# Altium PCB Cubit3_main_pcb.PcbDoc (part 4 of 4)
Units mm, origin at the board's own origin, x right, y up, seen from the top; angles counter-clockwise.
Board outline 58.47 x 70 mm, 4 copper layers (Top Layer, Layer 2, Layer 3, Bottom Layer), stack 0.602 mm thick; 134 components, 100 nets, 451 pads, 313 vias.
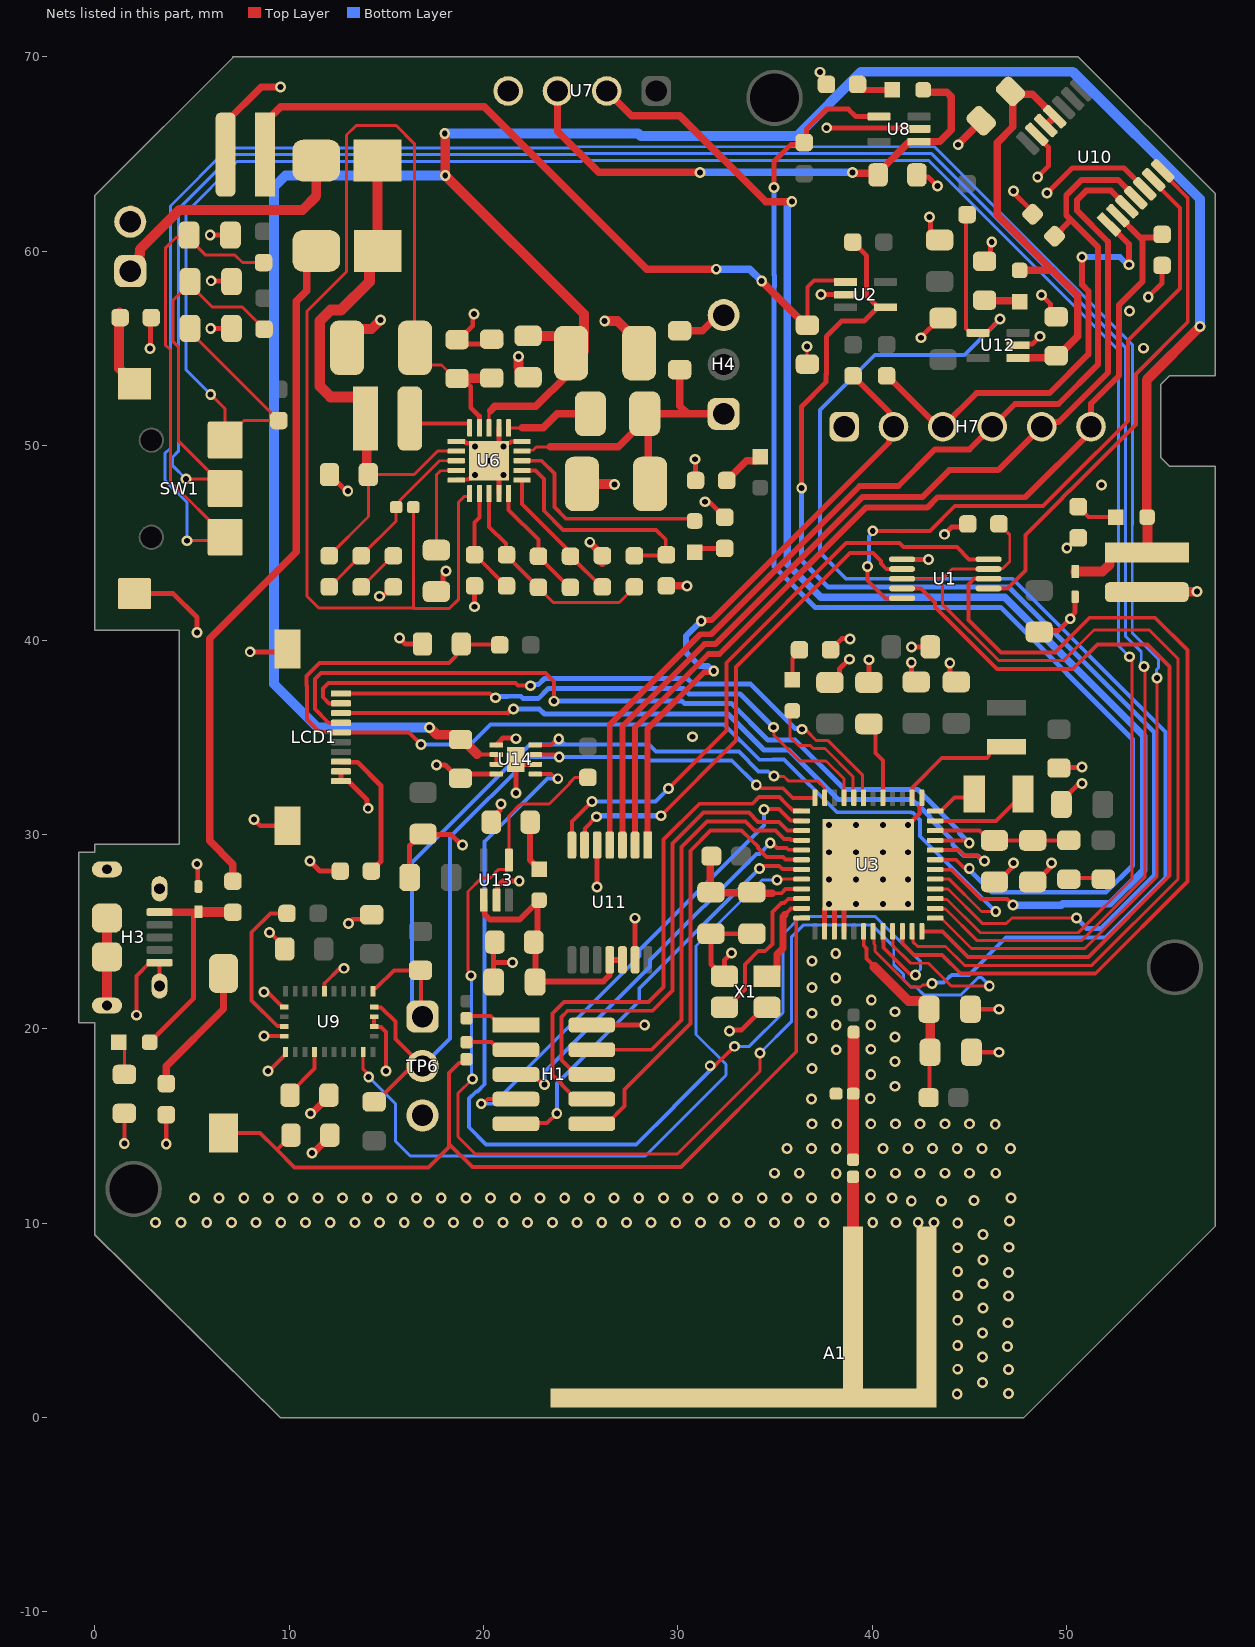
[diagram p4: the nets of this part, all layers, seen from the top]

## Via types
v1: diameter 0.559, hole 0.305, Top Layer to Bottom Layer, tented both sides, 311 vias
v2: diameter 0.61, hole 0.305, Top Layer to Bottom Layer, tented both sides, 2 vias

## Nets (pads, with @x,y where several pads share a name; then routed paths per layer and width w, separated by ;. In a path a pad name is that pad's centre, name@x,y a point inside that pad or via, vN(x,y) a via of type N, cw(c..) or ccw(c..) an arc to the next point about the centre after c; other vN are vias at no path point) (continued)
+3V7_VBAT: C24.1 C25.1 C42.1 H2.V+ LED7.A U4.1 U6.18 U14.2 U14.3 | length 138.9
  Top Layer w0.152: U6.18@20.294,50.916 20.294,51.726 20.364,51.797
  Top Layer w0.203: 19.66,34.145 19.697,34.108 U14.2@20.663,34.108 U14.3@20.663,33.608
  Top Layer w0.381: 20.364,51.797 20.587,52.02 22.697,52.02 24.331,53.655 24.356,53.655 25.174,54.473 C24.1@25.174,54.864
  Top Layer w0.508: v1(17.221,35.509) 17.235,35.509 17.615,35.13 18.575,35.13 C42.1@18.821,34.884 18.921,34.884 19.66,34.145 ; v1(18.009,66.065) 18.009,66.052 18.034,66.026 v1(18.034,63.906) 25.174,56.766 C24.1@25.174,54.864 ; C25.1@22.301,55.651 23.907,55.651 24.514,55.044 C24.1@24.514,54.762 ; U4.1@50.444,43.508 U4.1@50.444,43.525 51.856,43.525 52.222,43.891 52.222,44.247 52.476,44.501 H2.V+@54.127,44.501 54.166,44.539 LED7.A@54.166,46.38 ; LED7.A@54.127,46.38 54.127,53.391 v1(56.871,56.134)
  Bottom Layer w0.508: v1(17.221,35.509) 11.455,35.509 9.22,37.744 9.22,63.304 9.823,63.906 v1(18.034,63.906) ; v1(18.009,66.065) 27.963,66.065 28.093,65.936 36.129,65.936 39.433,69.24 50.317,69.24 56.871,62.687 v1(56.871,56.134)
+5V_VBUS: H3.1 LED8.A R23.1 U5.1 | length 11.5
  Top Layer w0.254: LED8.A@2.832,19.304 5.08,21.552 5.08,25.749 U5.1@5.334,26.003
  Top Layer w0.381: H3.1@3.335,26.003 U5.1@5.325,26.003
  Top Layer w0.508: U5.1@5.334,26.02 5.345,26.009 7.1,26.009 R23.1@7.112,25.997
AVDD: C18.1 C19.1 R17.2 U3.34 | length 7.1
  Top Layer w0.203: U3.34@43.237,30.198 45.53,30.198 46.036,29.693 C19.1@46.292,29.693 48.273,29.693 48.278,29.697 50.148,29.697 R17.2@50.153,29.702
BATT_MON_ALRT: U3.20 U14.5 | length 57.4
  Top Layer w0.203: U14.5@22.669,33.126 22.687,33.108 23.488,33.108 23.729,32.868 v1(23.825,32.868) ; v1(31.666,18.099) 31.782,17.984 31.783,17.984 32.259,18.459 32.276,18.459 v1(32.918,19.101) ; U3.20@40.552,25.013 40.566,24.999 40.566,24.502 40.572,24.496 40.572,24.172 41.912,22.832 42.164,22.832 v1(42.232,22.764)
  Bottom Layer w0.152: v1(32.918,19.101) 33.68,19.101 35.408,20.828 35.408,24.858 36.33,25.781 40.163,25.781 42.494,23.45 42.494,23.184 42.489,23.18 42.489,23.06 42.232,22.802 v1(42.232,22.764)
  Bottom Layer w0.203: v1(23.825,32.868) 23.301,32.868 20.066,29.633 20.066,17.161 19.689,16.785 19.63,16.785 19.253,16.408 19.253,14.935 20.142,14.046 27.863,14.046 29.793,15.976 29.793,16.005 31.723,17.935 31.723,18.043 v1(31.666,18.099)
BRD_Reset: C20.1 R13.1 SW2.1 U3.12 | length 46.8
  Top Layer w0.203: SW2.1@6.629,14.645 8.506,14.645 9.322,13.83 ; C20.1@10.1,14.529 10.1,14.509 9.42,13.83 9.322,13.83 ; R13.1@19.126,18.432 18.933,18.239 18.746,18.239 18.237,17.73 18.237,13.998 18.237,13.92 ; U3.12@36.367,25.698 36.122,25.698 36.094,25.67 36.094,18.822 30.154,12.882 19.431,12.882 18.315,13.998 18.237,13.92 ; 9.322,13.83 10.287,12.865 17.181,12.865 18.237,13.92
DECOUPLE: C16.1 U3.41 | length 4.1
  Top Layer w0.203: C16.1@39.913,35.679 40.159,35.433 40.159,34.198 40.552,33.805 U3.41@40.552,31.883
FEED: A1.FEED L2.2 | length 6.8
  Top Layer w0.254: A1.FEED@38.964,5.613 A1.FEED@39.014,5.664
  Top Layer w0.62: A1.FEED@39.014,5.664 L2.2@39.014,12.387
GND: A1.GND C1.2 C2.2 C3.2 C4.2 C5.2 C6.2 C7.2 C8.2 C9.2 C10.2 C11.2 C12.2 C13.2 C14.2 C15.2 C16.2 C17.2 C18.2 C19.2 C20.2 C21.2 C22.2 C23.2 C24.2 C25.2 C26.2 C27.2 C28.2 C29.2 C30.2 C31.2 C32.2 C33.2 C34.2 C35.2 C36.2 C37.2 C38.2 C39.2 C40.2 C41.2 C42.2 H1.2 H2.V- H3.5 H3.S1 H3.S2 H3.S3 H3.S4 H3.S5 H3.S6 H5.2 H7.1 H8.V- LCD1.9 LCD1.10 LCD1.11 LCD1.12 R1.1 R4.2 R6.1 R16.2 R18.1 R20.2 R26.1 R27.2 R31.2 R32.1 R34.1 R35.2 R36.1 R38.2 R40.2 R41.1 R42.2 R43.1 SW1.5 TP6.3 U1.6 U2.2 U3.0 U3.14 U3.15 U3.16 U3.37 U4.2 U5.2 U6.0 U6.1 U6.5 U6.9 U6.15 U6.17 U7.4 U8.2 U9.2 U9.5 U9.6 U9.17 U9.18 U9.25 U10.5 U10.13 U11.5 U11.13 U12.2 U13.2 U14.0 U14.1 U14.4 U14.6 X1.2 X1.4 | length 181.4
  Top Layer w0.152: v1(36.65,55.094) 36.65,54.211 C40.2@36.667,54.194
  Top Layer w0.203: v1(1.524,14.097) R35.2@1.524,15.653 ; v1(2.159,20.701) 2.159,22.725 2.86,23.426 3.335,23.426 H3.S2@3.335,22.226 ; v1(8.712,19.633) 8.725,19.621 U9.5@9.753,19.621 ; v1(8.712,21.894) 8.78,21.826 8.96,21.826 9.642,21.144 9.729,21.144 U9.2@9.753,21.121 ; v1(8.915,17.831) 8.975,17.831 9.815,18.671 U9.6@9.815,18.808 ; v1(9.001,24.955) 9.015,24.955 9.779,24.191 C30.2@9.779,24.105 ; U9.25@11.815,21.933 11.834,21.953 11.834,22.343 12.605,23.114 v1(12.827,23.114) ; U9.18@14.378,20.621 U9.17@14.378,20.121 14.397,20.101 14.737,20.101 14.994,19.845 v1(14.994,17.831) ; U6.5@18.604,48.226 18.632,48.254 19.195,48.254 19.243,48.303 19.37,48.303 v1(19.557,48.489) ; U6.0@21.158,50.09 21.217,50.149 21.37,50.149 21.425,50.205 21.962,50.205 U6.15@21.984,50.226 ; 42.426,31.072 42.426,31.448 U3.37@42.549,31.571
  Top Layer w0.254: SW1.5@2.046,42.388 4.043,42.388 5.263,41.168 v1(5.263,40.39) ; v1(2.845,54.991) 2.877,55.023 2.877,56.56 R4.2@2.908,56.591 ; v1(3.683,14.072) R18.1@3.683,15.583 ; v1(5.269,28.471) 5.301,28.439 5.301,27.353 U5.2@5.334,27.32 ; v1(5.943,60.833) C5.2@6.984,60.833 ; v1(5.969,56.032) C3.2@7.036,56.032 ; v1(5.994,58.483) C4.2@7.036,58.483 ; v1(8.001,39.395) 9.77,39.395 LCD1.11@9.921,39.546 ; v1(8.204,30.759) 8.518,30.446 LCD1.12@9.921,30.446 ; v1(11.074,28.626) 11.582,28.118 R1.1@12.637,28.118 ; C26.2@12.08,48.515 12.08,48.481 12.479,48.082 12.522,48.082 12.94,47.665 v1(13.022,47.665) ; LCD1.9@12.671,33.246 LCD1.10@12.671,32.746 13.036,32.746 14.013,31.769 14.013,31.404 v1(14.072,31.345) ; v1(13.056,25.425) 13.268,25.638 14.021,25.638 C29.2@14.249,25.867 ; v1(14.654,42.253) 14.713,42.311 14.89,42.311 15.342,42.763 R20.2@15.443,42.763 ; v1(15.673,40.106) 15.674,40.106 15.982,39.798 C2.2@16.863,39.798 ; C39.2@16.205,27.788 16.205,29.428 C1.2@16.8,30.023 ; C1.2@16.724,30.023 C1.2@16.8,30.023 ; v1@17.577,33.604 v1(17.577,33.579) 18.024,33.579 18.719,32.884 C42.2@18.821,32.884 19.046,33.108 U14.4@20.663,33.108 ; C27.2@17.577,42.494 17.924,42.842 17.924,43.409 v1(18.077,43.561) ; U6.1@18.604,50.226 18.607,50.223 19.017,50.223 19.116,50.124 19.396,50.124 v1(19.557,49.963) ; C23.2@18.644,55.458 18.744,55.458 19.449,56.163 19.449,56.711 v1(19.507,56.769) ; v1(18.923,29.454) 18.878,29.454 18.343,29.989 16.925,29.989 C1.2@16.891,30.023 C1.2@16.8,30.023 ; C23.2@19.16,55.227 C22.2@20.938,55.227 ; v1(19.541,41.714) R32.1@19.541,42.786 ; v1(20.294,49.226) 20.794,49.726 U6.17@20.794,50.916 ; R42.2@20.403,30.632 20.403,30.799 20.843,31.24 20.843,31.516 v1(20.902,31.575) ; C35.2@20.523,22.403 20.523,23.419 ; C37.2@20.523,24.46 20.523,23.419 ; U13.2@20.65,26.594 U13.2@20.676,26.619 20.73,26.673 20.73,27.343 20.997,27.61 v1(21.844,27.61) ; U14.1@20.663,34.608 20.843,34.788 20.843,34.796 21.006,34.959 21.632,34.959 v1(21.666,34.925) ; U6.9@20.794,47.536 20.794,48.328 20.955,48.489 v1(21.03,48.489) ; v1(21.03,49.963) U6.0@21.158,50.09 ; v1(21.488,23.419) 20.523,23.419 ; v1(21.666,32.131) U14.0@21.666,33.858 21.916,33.608 U14.6@22.669,33.608 ; U6.15@21.699,50.226 U6.15@21.984,50.226 ; C25.2@22.301,53.518 22.327,53.492 C25.2@22.339,53.505 ; H1.2@25.572,20.193 v1(28.296,20.193) ; v1(25.85,27.298) U11.5@25.85,29.45 ; v1@26.72,48.032 v1(26.745,48.007) ; U11.13@27.8,23.55 v1(27.8,25.692) ; v1(30.886,49.302) 30.911,49.277 R27.2@30.911,48.21 ; v1(31.394,47.117) 31.453,47.059 31.669,47.059 R26.1@32.41,46.318 ; X1.2@32.325,22.708 31.699,23.333 C8.2@31.699,24.892 C9.2@33.807,24.892 ; X1.2@32.395,22.708 32.395,23.53 v1(32.766,23.901) ; v1(32.664,19.888) 32.723,19.947 33.284,19.947 34.445,21.108 X1.4@34.595,21.108 ; v1(37.313,69.215) 37.313,69.133 37.384,69.061 37.384,68.848 R38.2@37.647,68.585 ; v1(37.363,57.785) 37.376,57.772 38.621,57.772 U2.2@38.633,57.76 ; U3.14@37.552,25.013 37.552,26.198 v1(37.77,26.416) ; v1(37.659,66.353) 42.355,66.353 U8.2@42.409,66.299 ; C17.2@37.821,37.821 37.912,37.821 38.307,38.216 38.307,38.511 38.811,39.014 v1(38.837,39.014) ; R16.2@37.859,39.497 38.435,40.073 38.844,40.073 v1(38.862,40.056) ; U3.15@38.052,25.013 38.052,26.698 U3.0@38.552,27.198 ; U3.16@38.552,25.013 U3.0@38.552,27.198 ; C16.2@39.827,37.821 v1(39.827,38.989) ; U1.6@41.536,44.155 42.891,44.155 v1(42.901,44.145) ; v1@41.935,39.649 v1(42.02,39.649) C15.2@42.986,39.649 ; v1(42.012,38.837) 42.012,38.1 C13.2@42.266,37.846 ; C32.2@42.3,63.932 42.407,63.826 42.876,63.826 43.336,63.366 v1(43.351,63.366) ; 42.426,31.072 v1(41.834,30.48) U3.0@39.802,28.448 U3.0@38.552,27.198 ; v1(42.505,55.552) 42.505,55.57 43.5,56.564 C38.2@43.648,56.564 ; U3.37@42.549,31.571 U3.37@42.549,31.88 ; v1(42.951,61.773) 43.01,61.714 43.01,60.977 43.405,60.581 C41.2@43.47,60.581 ; v1(43.713,45.441) 44.089,45.816 44.762,45.816 R6.1@44.92,45.974 ; v1(43.993,38.811) 44.005,38.799 44.005,38.188 43.993,38.176 C14.2@44.323,37.846 ; C11.2@45.06,21.006 v1(46.533,21.006) ; C10.2@45.11,18.796 v1(46.533,18.796) ; R40.2@45.782,59.485 46.093,59.797 46.093,60.419 v1(46.152,60.477) ; C19.2@46.292,27.559 46.458,27.559 47.211,28.312 47.211,28.478 v1(47.269,28.537) ; v1(47.269,63.094) 47.269,63.011 48.253,62.027 R41.1@48.253,61.907 ; U12.2@47.509,55.167 47.563,55.221 48.232,55.221 v1@48.615,55.604 ; C18.2@48.26,27.559 48.427,27.559 49.167,28.299 49.167,28.466 v1(49.225,28.524) ; U10.13@48.471,66.013 48.471,65.951 49.06,65.361 49.06,64.376 v1(48.514,63.83) ; C6.2@48.59,40.411 48.68,40.501 49.595,40.501 v1(50.19,41.097) 50.19,41.18 50.444,41.434 U4.2@50.444,42.225 50.444,42.274 U4.2@50.517,42.347 ; v1@48.615,55.605 v1(48.637,55.627) ; v1(48.703,57.761) 49.165,57.299 49.165,56.928 C36.2@49.465,56.628 ; v1(48.997,62.992) 50.292,64.287 52.954,64.287 U10.5@54.022,63.22 ; C12.2@49.606,33.417 49.636,33.447 50.77,33.447 v1(50.8,33.477) ; C33.2@49.733,31.547 49.733,31.713 50.575,32.555 50.742,32.555 v1(50.8,32.614) ; v1(50.013,44.732) 50.039,44.732 50.57,45.263 R31.2@50.597,45.263 ; H2.V-@54.006,42.347 H2.V-@54.127,42.469 ; v1(54.204,57.658) 54.915,58.369 R43.1@54.915,59.271
  Top Layer w0.381: H8.V-@6.731,64.973 6.731,66.624 8.56,68.453 v1(9.55,68.453) ; v1(11.1,15.637) 11.134,15.671 11.202,15.671 12.049,16.518 C31.2@12.049,16.586 ; v1(11.176,13.605) 11.21,13.639 11.278,13.639 12.1,14.461 C20.2@12.1,14.529 ; v1(25.472,45.034) 25.472,45.017 26.137,44.353 R36.1@26.154,44.353 ; R36.1@26.103,43.955 R36.1@26.12,43.972 ; R34.1@29.413,42.786 v1(30.476,42.786) ; v1(44.425,65.481) 44.425,65.507 45.608,66.69 C34.2@45.608,66.716
  Top Layer w0.508: H3.S6@0.635,21.226 H3.S4@0.635,25.726 ; H5.2@1.868,62.128 H5.2@2.198,61.798 ; C21.2@12.985,55.042 12.985,55.271 13.709,55.996 14.241,55.996 v1(14.709,56.464) ; v1(21.801,54.585) 21.811,54.575 21.811,54.033 21.863,53.981 21.863,53.796 22.154,53.505 C25.2@22.339,53.505 ; C28.2@25.072,48.032 v1@26.72,48.032 ; v1(26.238,56.413) 26.888,56.413 28.014,55.287 C24.2@28.014,54.762 ; H2.V-@54.127,42.469 54.143,42.484 56.708,42.484 v1(56.718,42.494)
  other v1: 44.374,1.219 47.015,1.245 45.669,1.803 47.015,2.464 44.399,2.489 45.669,3.124 46.965,3.658 44.399,3.708 45.669,4.343 46.99,4.877 44.399,5.004 45.695,5.639 47.015,6.248 44.399,6.274 45.695,6.883 47.015,7.468 44.399,7.518 45.695,8.103 44.399,8.738 47.041,8.763 45.695,9.423 44.399,10.008 3.124,10.033 4.445,10.033 5.766,10.033 7.036,10.033 8.306,10.033 9.576,10.033 10.846,10.033 12.116,10.033 13.386,10.033 14.656,10.033 15.926,10.033 17.196,10.033 18.466,10.033 19.736,10.033 21.006,10.033 22.276,10.033 23.546,10.033 24.816,10.033 26.086,10.033 27.356,10.033 28.626,10.033 29.896,10.033 31.166,10.033 32.436,10.033 33.706,10.033 34.976,10.033 36.246,10.033 37.516,10.033 40.03,10.033 41.224,10.033 42.367,10.033 43.179,10.035 47.066,10.109 42.012,11.151 43.561,11.151 45.237,11.176 5.131,11.303 6.401,11.303 7.671,11.303 8.941,11.303 10.211,11.303 11.481,11.303 12.751,11.303 14.021,11.303 15.291,11.303 16.561,11.303 17.831,11.303 19.101,11.303 20.371,11.303 21.641,11.303 22.911,11.303 24.181,11.303 25.451,11.303 26.721,11.303 27.991,11.303 29.261,11.303 30.531,11.303 31.801,11.303 33.071,11.303 34.341,11.303 35.611,11.303 36.881,11.303 38.151,11.303 39.903,11.303 41.021,11.303 47.142,11.303 38.151,12.548 34.976,12.573 36.246,12.573 39.929,12.573 41.199,12.573 42.469,12.573 43.739,12.573 45.009,12.573 46.355,12.573 35.611,13.843 36.881,13.843 38.151,13.843 40.564,13.843 41.834,13.843 43.104,13.843 44.374,13.843 45.644,13.843 47.117,13.843 46.33,15.088 36.906,15.113 38.176,15.113 39.929,15.113 41.199,15.113 42.469,15.113 43.739,15.113 45.009,15.113 36.881,16.383 39.903,16.408 41.173,17.043 39.929,17.653 36.906,17.958 41.173,18.313 38.151,18.923 39.929,18.948 36.906,19.507 41.173,19.583 38.151,20.193 39.929,20.193 36.906,20.803 41.173,20.879 38.151,21.463 39.954,21.488 36.906,22.123 38.125,22.606 36.906,23.495 38.125,23.876 39.167,26.416 40.564,26.416 41.834,26.416 37.77,27.686 39.167,27.686 40.564,27.686 41.834,27.686 39.167,29.083 40.564,29.083 41.834,29.083 39.167,30.48 40.564,30.48 30.759,35.027 51.791,47.981 53.95,55.016 53.238,56.921
  other v2: 37.77,29.083 37.77,30.48
HFXTAL_N: U3.10 X1.3 | length 8
  Top Layer w0.203: X1.3@32.395,21.108 32.545,21.108 33.45,22.013 33.45,23.316 34.137,24.003 34.498,24.003 34.863,24.368 34.863,25.999 35.332,26.468 35.466,26.468 35.681,26.684 36.352,26.684 U3.10@36.367,26.698
HFXTAL_P: U3.11 X1.1 | length 4.6
  Top Layer w0.203: 35.503,25.867 35.647,26.011 35.655,26.011 35.828,26.184 36.352,26.184 U3.11@36.367,26.198
  Top Layer w0.381: X1.1@34.595,22.708 34.745,22.708 35.104,23.067 35.104,23.837 35.409,24.141 35.409,25.773 35.503,25.867
I2C0_SCL: R10.2 TP6.2 U3.48 U9.19 U14.7 | length 42.6
  Top Layer w0.203: R10.2@14.376,16.24 14.476,16.24 16.044,17.808 16.589,17.808 TP6.2@16.866,18.085 15.469,19.482 15.469,20.37 14.737,21.101 14.397,21.101 U9.19@14.378,21.121 ; U14.7@22.669,34.108 23.787,34.108 23.901,33.993 v1(23.901,33.985) ; v1(34.038,32.538) 34.134,32.538 34.296,32.376 35.419,32.376 35.912,31.883 U3.48@37.052,31.883
  Bottom Layer w0.203: TP6.2@16.866,18.085 18.288,19.507 18.288,29.859 22.414,33.985 23.749,33.985 v1@23.901,34.138 ; v1(23.901,33.985) 28.294,33.985 28.478,33.801 32.775,33.801 v1(34.038,32.538)
I2C0_SDA: R11.2 TP6.1 U3.47 U9.20 U14.8 | length 40.3
  Top Layer w0.152: v1(34.95,33.011) 34.978,32.983 35.458,32.983 35.703,32.738 37.194,32.738 37.549,32.384 U3.47@37.549,31.886
  Top Layer w0.203: U9.20@14.315,21.933 14.315,22.071 14.338,22.094 14.476,22.094 15.389,23.007 R11.2@16.744,23.007 ; R11.2@16.764,23.007 16.784,22.987 16.784,20.707 TP6.1@16.866,20.625 ; U14.8@22.669,34.608 23.469,34.608 23.78,34.919 v1(23.876,34.919)
  Top Layer w0.254: U3.47@37.549,31.886 U3.47@37.552,31.883
  Bottom Layer w0.203: TP6.1@16.332,20.619 16.332,28.55 22.403,34.62 24.203,34.62 ; v1(23.876,34.919) 23.905,34.919 24.203,34.62 ; v1(34.95,33.011) 34.891,33.011 34.654,33.249 34.151,33.249 33.142,34.258 28.871,34.258 28.509,34.62 24.203,34.62
IMU_CAP: C31.1 U9.9 | length 2.7
  Top Layer w0.203: C31.1@10.049,16.586 10.049,16.686 11.315,17.952 U9.9@11.315,18.808
IMU_INT: U3.8 U9.14 | length 38.4
  Top Layer w0.152: U9.14@13.815,18.808 13.815,17.918 14.097,17.636 v1(14.097,17.526) ; v1(35.103,27.661) 35.14,27.698 U3.8@36.367,27.698
  Bottom Layer w0.152: v1(14.097,17.526) 15.469,16.154 15.469,14.234 16.24,13.462 28.321,13.462 32.474,17.615 32.474,18.173 30.937,19.71 30.937,24.267 34.331,27.661 v1(35.103,27.661)
LASER_PWR: C40.1 H8.V+ U2.1 | length 38.6
  Top Layer w0.203: C40.1@36.667,56.194 36.667,58.165 36.999,58.496 38.557,58.496 U2.1@38.633,58.42
  Top Layer w0.381: H8.V+@8.763,64.973 8.763,66.624 9.576,67.437 20.041,67.437 28.397,59.08 v1(31.979,59.08) ; v1(34.315,58.471) 34.315,58.458 C40.1@36.58,56.194
  Bottom Layer w0.381: v1(31.979,59.08) 33.706,59.08 v1(34.315,58.471)
LASER_SW: R14.1 U2.4 U3.28 | length 62.3
  Top Layer w0.152: U3.28@43.237,27.198 43.245,27.19 43.895,27.19 45.66,25.425 46.916,25.425 47.195,25.705 v1(50.502,25.705)
  Top Layer w0.254: v1(36.373,47.828) 36.373,52.019 37.617,53.264 37.617,53.652 37.648,53.683 37.648,55.631 38.43,56.413 39.585,56.413 U2.4@40.296,57.125 ; R14.1@39.002,60.477 39.715,59.764 39.715,57.706 U2.4@40.296,57.125 ; U2.4@40.691,57.125 U2.4@40.296,57.125
  Bottom Layer w0.254: v1(36.373,47.828) 36.373,44.094 37.744,42.723 47.04,42.723 54.534,35.229 54.534,27.921 51.784,25.171 51.036,25.171 v1(50.502,25.705)
LBOOST: L7.2 U6.20 | length 3.2
  Top Layer w0.203: L7.2@16.255,51.131 19.265,51.131 19.294,51.103 U6.20@19.294,50.916
LBUCK: L8.1 U6.16 | length 4.5
  Top Layer w0.152: U6.16@21.294,50.916 21.984,50.916
  Top Layer w0.381: 21.984,50.916 23.082,50.916 23.805,51.639 L8.1@25.498,51.639
LCD_CS: LCD1.3 U3.32 | length 39.4
  Top Layer w0.203: LCD1.3@12.671,36.246 21.254,36.246 ; U3.32@43.237,29.198 44.448,29.198 44.718,28.928 45.386,28.928 45.684,28.63 v1(45.78,28.63)
  Top Layer w0.254: 21.254,36.246 21.457,36.449 v1(21.539,36.449)
  Bottom Layer w0.254: v1(21.539,36.449) 22.885,36.449 23.139,36.195 32.581,36.195 34.435,34.341 35.712,34.341 38.252,31.801 42.022,31.801 42.225,31.598 42.297,31.598 42.951,30.943 42.951,30.871 44.145,29.677 44.145,29.479 44.721,28.903 45.425,28.903 45.698,28.63 v1(45.78,28.63)
LCD_DISP: C2.1 LCD1.5 R7.1 U3.29 | length 57.7
  Top Layer w0.152: U3.29@43.237,27.698 43.962,27.698 45.625,26.035 v1(46.355,26.035)
  Top Layer w0.203: v1(16.789,34.62) 16.164,35.246 LCD1.5@12.671,35.246 12.655,35.262 11.576,35.262 10.922,35.916 10.922,37.643 10.897,37.668 10.897,38.141 11.572,38.817 18.232,38.817 18.566,39.151 18.566,39.501 C2.1@18.863,39.798 ; C2.1@18.938,39.773 20.81,39.773 R7.1@20.835,39.747
  Bottom Layer w0.203: v1(16.789,34.62) 19.329,34.62 20.259,35.55 20.371,35.662 32.385,35.662 34.205,33.842 34.883,33.842 34.9,33.858 35.471,33.858 38.189,31.14 42,31.14 42.025,31.115 42.097,31.115 42.469,30.743 42.469,29.907 44.743,27.633 44.757,27.633 v1(46.355,26.035)
LCD_EXTCOM: LCD1.4 U3.33 | length 43.1
  Top Layer w0.203: LCD1.4@12.671,35.746 12.03,35.746 11.328,36.448 11.328,37.998 11.639,38.309 23.184,38.309 23.622,37.871 v1(23.622,36.855) ; U3.33@43.238,29.697 44.765,29.697 44.899,29.563 v1(44.995,29.563)
  Bottom Layer w0.254: v1(23.622,36.855) 30.225,36.855 30.352,36.728 32.766,36.728 34.64,34.854 36.037,34.854 38.583,32.309 42.342,32.309 44.484,30.166 44.484,30.073 v1(44.995,29.563)
LFXTAL_N: U3.35 Y1.2 | length 5.5
  Top Layer w0.203: U3.35@43.237,30.698 46.369,30.698 47.783,32.112 Y1.2@47.783,32.512
LFXTAL_P: U3.36 Y1.1 | length 2.3
  Top Layer w0.203: U3.36@43.237,31.198 43.537,31.198 44.241,31.902 Y1.1@45.257,31.902
MAG_ENC_A: U1.3 U3.22 | length 46.1
  Top Layer w0.203: U3.22@41.552,25.013 41.566,24.999 41.566,24.399 42.16,23.805 43.598,23.805 44.568,22.835 51.476,22.835 56.21,27.569 56.21,39.497 54.559,41.148 51.181,41.148 49.403,39.37 46.626,39.37 44.956,41.04 44.956,42.864 45.25,43.158 U1.3@45.92,43.158
MAG_ENC_B: U1.9 U3.24 | length 42.4
  Top Layer w0.203: U1.9@41.536,42.655 42.516,42.655 43.228,41.943 43.228,41.69 46.412,38.506 50.317,38.506 51.587,39.776 54.153,39.776 55.296,38.633 55.296,27.876 51.118,23.698 44.926,23.698 43.611,25.013 U3.24@42.552,25.013
MAG_ENC_DATA_SW: R6.2 U1.4 U1.8 U3.23 | length 51.8
  Top Layer w0.152: U1.8@41.536,43.155 43.609,43.155 ; U3.23@42.052,25.013 42.092,24.973 42.092,24.484 42.339,24.237 43.777,24.237 44.747,23.266 51.297,23.266 55.728,27.697 55.728,39.04 54.254,40.513 51.41,40.513 49.835,38.938 46.519,38.938 43.609,41.848 43.609,43.155 ; R6.2@46.52,45.974 47.076,45.418 47.076,44.04 46.71,43.674 46.58,43.674 46.56,43.655 U1.4@45.986,43.655 44.109,43.655 43.609,43.155
MAG_ENC_P_A: U1.5 U11.7 | length 31
  Top Layer w0.203: U11.7@24.55,29.45 24.55,30.656 v1(25.585,31.692) ; v1(29.515,32.36) 32.495,35.34 32.495,38.833 38.649,44.987 41.397,44.987 41.604,44.78 44.352,44.78 44.978,44.155 U1.5@45.986,44.155
  Bottom Layer w0.203: v1(25.585,31.692) 28.847,31.692 v1(29.515,32.36)
MAG_ENC_P_B: U1.7 U11.6 | length 25.2
  Top Layer w0.203: U11.6@25.2,29.45 25.219,29.469 25.219,30.316 v1(25.814,30.912) ; v1(29.136,30.963) 33.003,34.83 33.003,38.622 38.859,44.479 40.049,44.479 40.451,44.077 40.451,43.928 40.725,43.655 U1.7@41.014,43.655
  Bottom Layer w0.305: v1(25.814,30.912) 25.863,30.96 26.042,30.96 26.045,30.963 v1(29.136,30.963)
MAG_ENC_P_CS: H7.2 R24.1 U11.1 | length 32.2
  Top Layer w0.305: U11.1@28.45,29.45 28.45,35.435 31.371,38.356 31.8,38.356 v1(31.848,38.404) ; v1(31.205,40.986) 31.254,41.034 31.738,41.034 40.864,50.16 40.864,50.745 H7.2@41.097,50.978 40.864,51.211 40.864,51.745 R24.1@39.014,53.594
  Bottom Layer w0.305: v1(31.205,40.986) 30.416,40.197 30.416,39.376 31.116,38.676 31.543,38.676 31.814,38.404 v1(31.848,38.404)
MAG_ENC_P_PW: C35.1 C37.1 LED12.A U11.11 U11.12 U13.1 | length 13.5
  Top Layer w0.305: U13.1@20.015,26.619 20.063,26.572 20.063,26.004 20.069,25.998 20.069,25.885 20.337,25.618 21.858,25.618 LED12.A@22.86,26.619 ; LED12.A@22.771,26.531 22.771,24.803 22.682,24.714 22.682,22.657 22.895,22.444 26.177,22.444 26.481,22.748 26.481,23.531 U11.11@26.5,23.55 U11.12@27.15,23.55
MAG_ENC_P_SW: R39.1 U3.21 U13.4 | length 68.2
  Top Layer w0.152: v1(19.355,22.733) 19.355,22.843 19.202,22.995 19.202,27.068 19.885,27.751 20.333,27.751 20.789,28.208 21.187,28.208 21.311,28.332 U13.4@21.311,28.677 21.311,30.961 21.871,31.521 21.919,31.521 21.96,31.563 23.382,31.563 24.435,32.615 24.435,32.664 24.702,32.931 R39.1@25.375,32.931 ; v1(19.431,17.424) 18.694,16.688 18.694,14.453 19.583,13.564 29.972,13.564 34.231,17.823 v1(34.231,18.753) ; U3.21@41.052,25.013 41.075,24.99 41.075,24.28 41.981,23.373 42.895,23.373 44.069,22.2 v1(46.025,22.2)
  Bottom Layer w0.152: v1(19.355,22.733) 19.393,22.695 19.393,17.462 v1(19.431,17.424) ; v1(34.231,18.753) 35.839,20.362 35.839,24.715 36.473,25.349 39.978,25.349 41.11,24.217 41.11,23.302 41.622,22.79 41.622,22.511 41.979,22.154 42.258,22.154 42.683,21.728 44.538,21.728 45.441,22.631 45.63,22.631 46.025,22.237 v1(46.025,22.2)
MAG_ENC_W_A: U1.2 U10.7 | length 26.8
  Top Layer w0.203: U1.2@45.986,42.655 46.555,42.655 46.556,42.656 46.952,42.656 47.879,43.584 47.879,45.399 49.791,47.311 49.791,47.328 50.131,47.669 50.148,47.669 53.569,51.089 53.569,53.687 56.236,56.354 56.236,62.746 55.314,63.667 55.314,63.766 U10.7@54.941,64.139
MAG_ENC_W_B: U1.10 U10.6 | length 34.1
  Top Layer w0.203: v1(39.765,43.793) 39.765,43.064 40.68,42.149 U1.10@41.211,42.149 ; v1(40.03,45.622) 42.98,45.622 44.247,46.888 48.793,46.888 49.385,47.48 49.385,47.497 49.963,48.075 49.98,48.075 53.162,51.257 53.162,55.423 55.829,58.09 55.829,62.233 54.855,63.208 54.855,63.306 U10.6@54.481,63.679
  Bottom Layer w0.203: v1(39.765,43.793) 39.833,43.861 39.833,45.328 40.03,45.525 v1(40.03,45.622)
MAG_ENC_W_CS: H7.3 R15.1 U10.1 | length 23.2
  Top Layer w0.305: R15.1@40.742,53.594 40.781,53.594 43.397,50.978 H7.3@43.637,50.978 45.364,52.705 49.124,52.705 51.117,54.699 51.117,57.96 50.8,58.278 v1(50.8,59.702) ; U10.1@52.183,61.381 52.2,61.381 53.213,60.369 v1(53.213,59.309)
  Bottom Layer w0.305: v1(50.8,59.702) 52.751,59.702 53.144,59.309 v1(53.213,59.309)
MAG_ENC_W_PW: C34.1 C36.1 LED11.A U10.11 U10.12 U12.1 | length 23.2
  Top Layer w0.381: C34.1@47.117,68.224 C34.1@47.235,68.107 ; U12.1@47.509,54.507 47.518,54.517 49.353,54.517 C36.1@49.465,54.628 49.565,54.628 50.571,55.635 50.571,57.734 49.29,59.015 ; LED11.A@47.585,59.015 49.29,59.015 ; U10.12@48.93,66.473 U10.11@49.39,66.932 48.245,68.077 47.264,68.077 C34.1@47.235,68.107 ; C34.1@47.235,68.107 47.235,66.396 46.431,65.592 46.431,61.874 49.29,59.015
MAG_ENC_W_SW: R37.1 U3.19 U12.4 | length 74.8
  Top Layer w0.152: U3.19@40.052,25.013 40.092,24.973 40.092,24.366 40.14,24.317 40.14,23.993 41.979,22.154 42.484,22.154 42.59,22.26 42.991,22.26 v1(43.069,22.338)
  Top Layer w0.203: R37.1@44.882,61.887 44.831,61.836 44.831,59.991 44.826,59.986 44.826,56.02 44.945,55.901 45.353,55.901 U12.4@45.451,55.802 45.846,55.802 46.559,56.515 v1(46.584,56.515)
  Bottom Layer w0.203: v1(43.069,22.338) 43.105,22.374 43.662,22.374 43.968,22.68 43.997,22.68 44.097,22.78 44.978,22.78 46.887,24.689 52,24.689 55.1,27.789 55.1,35.273 47.219,43.155 38.658,43.155 37.313,44.5 37.313,51.841 40.132,54.661 44.759,54.661 46.584,56.485 v1(46.584,56.515)
NetC7_1: C7.1 L1.2 L2.1 | length 6.6
  Top Layer w0.254: L2.1@39.014,13.267 L2.1@39.018,13.271 ; C7.1@39.018,16.658 C7.1@39.023,16.662 C7.1@39.033,16.672 ; L1.2@39.033,19.819 L1.2@39.043,19.829
  Top Layer w0.62: L2.1@39.018,13.271 C7.1@39.018,16.658 ; C7.1@39.033,16.672 L1.2@39.033,19.819
NetD1_A: D1.A R23.2 | length 35.2
  Top Layer w0.381: R23.2@7.112,27.597 7.112,28.473 5.918,29.667 5.918,40.081 10.369,44.532 10.369,57.429 10.907,57.968 10.907,59.523 D1.A@11.404,60.02
NetH1_1: H1.1 R12.2 | length 2.9
  Top Layer w0.203: R12.2@19.126,20.54 19.254,20.668 20.377,20.668 20.852,20.193 H1.1@21.672,20.193 H1.1@21.604,20.261
NetH1_3: H1.3 R13.2 | length 2.7
  Top Layer w0.203: R13.2@19.126,19.312 20.415,19.312 20.804,18.923 H1.3@21.672,18.923
NetH4_3: H4.3 R25.1 | length 2.6
  Top Layer w0.381: R25.1@30.099,55.915 31.271,55.915 32.075,56.719 H4.3@32.359,56.719
NetH6_1: 
NetH6_2: 
NetL6_2: L6.2 R17.1 | length 1.9
  Top Layer w0.203: R17.1@50.544,27.753 L6.2@52.413,27.753
NetLCD1_8: LCD1.8 R1.2 | length 7.2
  Top Layer w0.254: LCD1.8@12.671,33.746 12.704,33.713 13.531,33.713 14.732,32.512 14.732,28.613 R1.2@14.237,28.118
NetLED4_C: LED4.C R16.1 | length 1.7
  Top Layer w0.203: LED4.C@35.89,37.96 35.89,39.062 36.259,39.43 R16.1@36.259,39.497
NetLED5_C: LED5.C R26.2 | length 1.6
  Top Layer w0.254: LED5.C@30.861,44.526 31.052,44.718 R26.2@32.41,44.718
NetLED6_C: LED6.C R27.1 | length 2.2
  Top Layer w0.381: R27.1@32.511,48.21 33.533,49.232 34.029,49.232 LED6.C@34.238,49.442
NetLED7_C: LED7.C R31.1 | length 2.2
  Top Layer w0.203: R31.1@50.597,46.863 51.13,46.33 LED7.C@52.54,46.33
NetLED8_C: LED8.C R35.1 | length 1.8
  Top Layer w0.152: LED8.C@1.232,19.304 1.524,19.012 R35.1@1.524,17.653
NetLED10_C: LED10.C R38.1 | length 2
  Top Layer w0.305: R38.1@39.247,68.585 39.286,68.585 39.565,68.306 LED10.C@41.025,68.306
  Top Layer w0.381: R38.1@39.247,68.585 R38.1@39.323,68.661
NetLED11_C: LED11.C R40.1 | length 1.8
  Top Layer w0.381: R40.1@45.782,57.485 45.817,57.45 47.55,57.45 LED11.C@47.585,57.415
NetLED12_C: LED12.C R42.1 | length 3.1
  Top Layer w0.305: R42.1@22.403,30.732 R42.1@22.403,30.632 22.403,28.677 LED12.C@22.86,28.219 LED12.C@22.612,27.972
NetR4_1: R4.1 SW1.1 | length 4
  Top Layer w0.508: R4.1@1.283,56.845 1.257,56.82 1.257,53.977 1.45,53.784 1.45,53.734 1.996,53.188 SW1.1@2.046,53.188
NetR8_1: R8.1 U9.4 | length 8
  Top Layer w0.203: U9.4@9.753,20.121 9.733,20.14 9.393,20.14 8.077,21.456 8.077,24.968 9.042,25.933 R8.1@9.893,25.933
NetR18_2: R18.2 SW2.2 | length 6.8
  Top Layer w0.381: R18.2@3.687,17.233 3.687,18.076 6.629,21.018 SW2.2@6.629,22.845
NetR19_2: R19.2 R20.1 | length 2.3
  Top Layer w0.152: R19.2@13.716,42.736 13.742,42.736 15.342,44.336 R20.1@15.367,44.336
NetS1_V-: 
NetS3_V-: 
NetS5_V-: 
NetS7_V-: 
NetS9_V-: 
OK_HYST: R29.1 R33.2 U6.10 | length 6.3
  Top Layer w0.152: R29.1@22.669,44.035 22.775,43.929 R29.1@22.801,43.929
  Top Layer w0.203: U6.10@21.294,47.536 21.294,46.702 22.832,45.164 R29.1@22.832,44.31 ; R29.1@22.835,44.31 24.435,42.71 R33.2@24.46,42.71
OK_PROG: R33.1 R36.2 U6.11 | length 7
  Top Layer w0.203: U6.11@21.984,48.226 21.984,47.003 R33.1@24.302,44.684 ; R33.1@24.302,44.053 24.426,43.929 R33.1@24.477,43.929 ; R33.1@24.511,44.31 26.086,42.736 R36.2@26.137,42.736
PAVDD: C10.1 C11.1 L4.2 U3.18 | length 10.5
  Top Layer w0.203: U3.18@39.552,25.013 39.566,24.999 39.566,24.28 39.708,24.138 39.708,23.614 40.124,23.198 40.124,23.183 ; L4.2@42.908,16.459 42.942,16.494 42.942,18.761 C10.1@42.977,18.796
  Top Layer w0.508: 40.124,23.183 41.868,21.439 42.648,21.439 42.926,21.161 C11.1@42.926,21.006 42.984,20.948 42.984,18.803 C10.1@42.977,18.796
PTI_DATA: H1.10 U3.6 | length 23.4
  Top Layer w0.203: H1.10@25.572,15.113 26.344,15.113 27.256,16.025 27.256,16.882 30.644,20.269 30.644,29.161 31.689,30.207 33.284,30.207 33.765,29.725 34.119,29.372 34.119,29.294 34.572,28.841 35.406,28.841 35.534,28.712 36.352,28.712 U3.6@36.367,28.698
PTI_FRAME: H1.9 U3.7 | length 21.5
  Top Layer w0.203: H1.9@21.672,15.113 22.54,15.113 22.572,15.145 23.273,15.145 v1(23.774,15.646) ; v1(34.196,28.255) 34.292,28.255 34.421,28.384 35.217,28.384 35.388,28.212 36.352,28.212 U3.7@36.367,28.198
  Bottom Layer w0.203: v1(23.774,15.646) 23.774,17.194 28.016,21.436 28.016,22.075 v1(34.196,28.255)
RFVDD: C8.1 C9.1 L3.2 U3.9 | length 6.1
  Top Layer w0.203: 34.858,26.975 35.326,26.975 35.549,27.198 U3.9@36.367,27.198
  Top Layer w0.381: C8.1@31.675,27.026 L3.2@31.675,28.396 ; C8.1@31.725,27 33.782,27 33.807,26.975 34.858,26.975
SOLAR_IN: D2.A H5.1 | length 13.2
  Top Layer w0.152: H5.1@1.489,59.293 H5.1@1.512,59.293
  Top Layer w0.508: H5.1@1.854,59.207 1.972,59.207 2.302,59.538 2.302,59.822 2.327,59.847 2.327,60.105 4.35,62.128 10.693,62.128 11.399,62.834 D2.A@11.399,64.668
SPI_CLK: LCD1.1 U3.45 | length 29.5
  Top Layer w0.152: v1(34.925,35.515) 34.95,35.489 34.95,35.103 36.273,33.78 37.628,33.78 38.558,32.85 38.558,32.419 ; 38.557,32.418 38.557,32.198 U3.45@38.569,32.186
  Top Layer w0.203: LCD1.1@12.671,37.246 20.33,37.246 20.542,37.033 v1(20.625,37.033) v1@20.566,37.092
  Top Layer w0.254: U3.45@38.549,32.186 38.552,32.183 U3.45@38.552,31.883
  Bottom Layer w0.254: v1(20.625,37.033) 20.683,37.092 21.248,37.092 21.266,37.109 21.923,37.109 22.044,36.988 22.821,36.988 23.348,37.516 30.283,37.516 30.562,37.236 33.198,37.236 34.92,35.515 v1(34.925,35.515)
SPI_CLK_MAG: H7.6 R43.2 U10.2 U11.2 | length 49.7
  Top Layer w0.305: U11.2@27.8,29.45 27.8,35.503 31.581,39.284 32.143,39.284 39.671,46.812 42.824,46.812 43.358,47.346 47.879,47.346 51.257,50.724 51.257,52.164 52.705,53.612 52.705,57.245 53.899,58.439 53.899,60.591 53.784,60.706 ; U10.2@52.643,61.841 52.649,61.841 53.784,60.706 ; R43.2@54.915,60.871 54.75,60.706 53.899,60.706 53.784,60.706
SPI_MISO_MAG: H7.5 U10.3 U11.3 | length 51.3
  Top Layer w0.305: U11.3@27.15,29.45 27.15,35.572 31.37,39.792 31.932,39.792 39.511,47.371 42.593,47.371 43.965,48.743 46.482,48.743 H7.5@48.717,50.978 48.95,51.211 49.585,51.211 52.133,53.759 52.133,60.496 50.543,62.086 50.543,62.655 51.007,63.119 52.284,63.119 U10.3@53.102,62.301
SPI_MOSI: LCD1.2 U3.43 | length 32.9
  Top Layer w0.152: v1(36.391,35.412) 36.469,35.334 36.63,35.334 37.14,34.823 37.734,34.823 39.512,33.046 39.512,31.923 U3.43@39.552,31.883
  Top Layer w0.203: LCD1.2@12.671,36.746 12.047,36.746 11.735,37.059 11.735,37.498 12.034,37.797 21.641,37.797 21.768,37.67 22.407,37.67 v1(22.428,37.649)
  Bottom Layer w0.254: v1(22.428,37.649) 22.487,37.707 22.821,37.707 23.138,38.024 30.493,38.024 30.773,37.744 33.732,37.744 36.035,35.441 36.362,35.441 v1(36.391,35.412)
SPI_MOSI_MAG: H7.4 R41.2 U10.4 U11.4 | length 53.9
  Top Layer w0.305: U11.4@26.5,29.45 26.5,35.64 31.16,40.3 31.722,40.3 39.352,47.93 41.351,47.93 43.231,49.809 45.009,49.809 H7.4@46.177,50.978 47.346,52.146 49.581,52.146 51.625,54.191 51.625,60.214 50.243,61.596 ; R41.2@49.384,60.775 50.206,61.596 50.243,61.596 ; U10.4@53.562,62.76 52.645,63.678 50.776,63.678 49.984,62.886 49.984,61.855 50.243,61.596
SW_DOWN: C5.1 R5.1 SW1.4 U3.25 | length 138.6
  Top Layer w0.152: v1(4.75,45.11) 6.538,45.11 SW1.4@6.716,45.288 6.716,45.338 3.896,48.158 3.896,54.92 3.632,55.184 3.632,60.16 4.178,60.706 4.724,60.706 C5.1@4.851,60.833 4.851,60.666 5.714,59.803 7.223,59.803 7.602,59.423 R5.1@8.687,59.423 ; U3.25@43.237,25.698 43.537,25.698 45.105,24.13 50.939,24.13 54.661,27.852 v1(54.661,38.049)
  Bottom Layer w0.152: v1(4.75,45.11) 4.75,47.085 3.607,48.228 3.607,49.593 3.896,49.882 3.896,62.336 6.887,65.327 24.754,65.327 24.807,65.38 43.205,65.38 53.391,55.194 53.391,45.916 53.379,45.904 53.379,40.36 54.718,39.02 54.718,38.564 54.636,38.481 54.636,38.074 v1(54.661,38.049)
SW_GO: C4.1 R3.1 SW1.3 U3.26 | length 127.3
  Top Layer w0.152: v1(4.699,48.285) SW1.3@6.219,48.285 ; C4.1@4.902,58.445 C4.1@4.902,58.359 ; SW1.3@6.716,47.838 4.303,50.252 4.303,55.088 4.039,55.352 4.039,57.495 C4.1@4.902,58.359 ; R3.1@8.712,55.994 8.712,56.01 7.591,57.132 6.049,57.132 4.902,58.279 C4.1@4.902,58.359 ; U3.26@43.253,26.198 43.293,26.158 43.778,26.158 45.399,24.536 50.771,24.536 54.026,27.792 54.026,38.588 v1(53.975,38.639)
  Bottom Layer w0.152: v1(4.699,48.285) 4.013,48.971 4.013,49.424 4.303,49.714 4.303,62.167 7.106,64.971 24.901,64.971 24.954,65.024 43.058,65.024 53.024,55.059 53.024,40.212 53.842,39.394 53.842,38.889 53.833,38.879 53.833,38.824 53.975,38.681 v1(53.975,38.639)
SW_UP: C3.1 R2.1 SW1.2 U3.27 | length 114.9
  Top Layer w0.152: C3.1@4.902,56.032 4.902,55.867 R2.1@9.474,51.295 7.681,51.295 SW1.2@6.716,50.331 ; v1(5.969,52.629) 6.716,51.882 SW1.2@6.716,50.331 ; SW1.2@6.716,50.288 SW1.2@6.716,50.331 ; U3.27@43.237,26.698 43.277,26.658 43.852,26.658 45.568,24.943 50.602,24.943 53.365,27.706 53.365,38.899 53.233,39.031 v1(53.233,39.141)
  Bottom Layer w0.152: v1(5.969,52.629) 4.709,53.889 4.709,61.999 7.325,64.615 25.048,64.615 25.101,64.668 42.911,64.668 52.668,54.911 52.668,39.706 v1(53.233,39.141)
SWCLK: H1.8 U3.1 | length 27.9
  Top Layer w0.203: H1.8@25.572,16.383 24.752,16.383 24.032,17.103 24.032,17.143 23.559,17.616 23.559,20.798 24.147,21.386 28.498,21.386 29.272,22.16 29.272,29.729 31.121,31.578 33.839,31.578 34.179,31.919 35.229,31.919 35.57,31.578 35.922,31.226 36.338,31.226 U3.1@36.367,31.198
SWDIO: H1.7 U3.2 | length 25.6
  Top Layer w0.203: v1(19.888,16.145) 19.984,16.145 20.223,16.383 H1.7@21.672,16.383 ; v1(34.442,31.284) 34.459,31.301 35.201,31.301 35.79,30.712 36.352,30.712 U3.2@36.367,30.698
  Bottom Layer w0.203: v1(19.888,16.145) 20.526,16.145 21.844,17.463 21.844,17.559 28.018,23.734 28.018,24.058 34.424,30.464 34.424,31.265 v1(34.442,31.284)
SWO: H1.6 U3.3 | length 25.6
  Top Layer w0.203: H1.6@25.572,17.653 24.752,17.653 24.016,18.389 24.016,20.609 24.336,20.929 28.687,20.929 29.729,21.971 29.729,29.54 31.31,31.121 33.663,31.121 34.135,30.649 35.206,30.649 35.643,30.212 36.352,30.212 U3.3@36.367,30.198
Test_Pin: LED4.A U3.44 | length 6.6
  Top Layer w0.152: LED4.A@35.712,36.182 35.763,36.132 35.763,35.012 36.206,34.569 36.819,34.569 36.972,34.417 37.566,34.417 39.012,32.971 39.012,31.923 U3.44@39.052,31.883
  Top Layer w0.254: LED4.A@35.712,36.182 LED4.A@35.89,36.36
ULTSEN_PWR: C32.1 LED10.A U7.3 U8.1 | length 27.5
  Top Layer w0.381: U7.3@23.809,68.25 23.809,66.183 25.933,64.06 v1@31.139,64.06 ; v1(38.989,64.059) 39.023,64.025 40.207,64.025 C32.1@40.3,63.932 ; C32.1@40.3,64.032 41.898,65.629 42.4,65.629 U8.1@42.409,65.639 ; U8.1@42.419,65.648 43.474,65.648 44.069,66.243 44.069,67.954 43.846,68.177 42.753,68.177 LED10.A@42.625,68.306
  Bottom Layer w0.381: v1(31.14,64.059) v1(38.989,64.059)
ULTSEN_SW: R9.1 U3.31 U8.4 | length 68
  Top Layer w0.203: U3.31@43.237,28.698 44.302,28.698 44.712,28.287 44.95,28.287 v1(44.995,28.242)
  Top Layer w0.254: v1(34.95,63.284) 34.95,64.618 35.818,65.485 36.184,65.485 36.214,65.515 36.214,65.881 36.581,65.881 36.61,65.911 36.61,66.278 37.648,67.315 38.777,67.315 39.158,66.934 U8.4@40.352,66.934
  Bottom Layer w0.254: v1(34.95,63.284) 34.95,58.77 34.976,58.744 34.976,58.197 34.95,58.172 34.95,43.791 37.06,41.681 46.608,41.681 53.391,34.899 53.391,28.394 52.022,27.026 46.155,27.026 44.995,28.185 v1(44.995,28.242)
US0_RX: H1.4 U3.4 | length 21.3
  Top Layer w0.203: H1.4@25.572,18.923 28.651,18.923 30.186,20.458 30.186,29.351 31.5,30.664 33.473,30.664 33.946,30.192 35.017,30.192 35.454,29.755 35.785,29.755 35.828,29.712 36.352,29.712 U3.4@36.367,29.698
US0_TX: H1.5 U3.5 | length 20.8
  Top Layer w0.203: H1.5@21.672,17.653 22.54,17.653 23.059,17.133 v1(23.139,17.133) ; v1(34.754,29.557) 34.85,29.557 35.109,29.298 35.595,29.298 35.681,29.212 36.352,29.212 U3.5@36.367,29.198
  Bottom Layer w0.203: v1(23.139,17.133) 23.139,17.773 28.579,23.212 28.579,23.536 34.046,29.003 34.201,29.003 v1(34.754,29.557)
US2_RX: U3.30 U7.2 | length 71.7
  Top Layer w0.203: U3.30@43.237,28.198 43.251,28.184 44.087,28.184 45.601,26.67 46.939,26.67 v1(47.244,26.365)
  Top Layer w0.381: U7.2@26.349,68.25 27.619,66.98 30.104,66.98 34.523,62.56 v1(35.865,62.56)
  Bottom Layer w0.381: v1(35.865,62.56) 35.865,62.512 35.636,62.283 35.636,43.914 37.348,42.202 46.824,42.202 53.962,35.064 53.962,34.113 53.962,28.157 52.233,26.429 49.795,26.429 49.731,26.365 v1(47.244,26.365)
VBAT_OK: LED5.A U6.13 | length 11.2
  Top Layer w0.203: U6.13@21.984,49.226 22.986,49.226 23.647,48.566 23.647,46.838 24.244,46.241 30.746,46.241 LED5.A@30.861,46.126
VBAT_OV: R28.1 R32.2 U6.7 | length 5.6
  Top Layer w0.203: R32.2@19.541,44.386 19.541,46.059 19.794,46.311 U6.7@19.794,47.536 ; R32.2@19.552,44.397 21.162,42.786 R28.1@21.184,42.786
VIN_DC: C26.1 D1.C D2.C L7.1 R22.1 U6.2 | length 29.2
  Top Layer w0.152: R22.1@12.065,44.336 14.082,46.352 C26.1@14.082,48.513 ; C26.1@14.08,48.515 16.435,48.515 17.646,49.726 U6.2@18.604,49.726
  Top Layer w0.508: C26.1@13.999,48.58 L7.1@13.999,51.101 ; D2.C@14.549,64.668 14.549,60.025 D1.C@14.554,60.02
  Top Layer w0.559: L7.1@13.931,51.395 13.931,52.146 13.575,52.502 12.141,52.502 11.576,53.066 11.576,56.406 12.145,56.975 12.678,56.975 14.138,58.434 14.138,59.603 D1.C@14.554,60.02
VOC_SAMP: R19.1 R21.1 R22.2 U6.3 | length 9.7
  Top Layer w0.152: R22.2@12.065,42.736 12.091,42.736 13.691,44.336 R19.1@13.716,44.336 15.511,46.131 R21.1@15.511,46.838 15.716,47.043 15.716,47.205 17.738,49.226 U6.3@18.604,49.226
VOUT: C28.1 H4.1 L8.2 R25.2 U6.14 | length 17.6
  Top Layer w0.152: U6.14@21.984,49.726 22.024,49.766 22.546,49.766 22.718,49.937 23.442,49.937
  Top Layer w0.381: 23.442,49.937 26.946,49.937 L8.2@28.298,51.289 ; C28.1@28.473,47.852 L8.2@28.473,51.289 ; L8.2@28.473,51.416 L8.2@28.473,51.289 ; C28.1@28.572,48.032 C28.1@28.826,48.286 ; R25.2@29.981,53.797 R25.2@30.099,53.915 30.099,52.043 30.503,51.639 ; H4.1@32.359,51.639 30.503,51.639 ; L8.2@28.473,51.289 28.473,51.464 28.648,51.639 30.503,51.639
VOUT_SET: R30.1 R34.2 U6.12 | length 12.3
  Top Layer w0.203: U6.12@21.984,48.726 21.992,48.718 22.681,48.718 23.113,48.286 23.113,46.653 24.097,45.669 28.88,45.669 29.379,45.17 29.379,44.37 29.388,44.361 27.793,44.361 R30.1@27.768,44.336
VRDIV: R28.2 R29.2 R30.2 U6.8 | length 11.4
  Top Layer w0.152: R29.2@22.809,42.71 23.589,41.93 26.982,41.93 R30.2@27.788,42.736
  Top Layer w0.203: U6.8@20.294,47.536 20.294,45.822 21.15,44.967 R28.2@21.15,44.423 ; R28.2@21.184,44.361 22.809,42.735 R29.2@22.809,42.71
VREF_SAMP: C27.1 U6.4 | length 5
  Top Layer w0.152: C27.1@17.577,44.628 17.577,48.49 17.797,48.71 18.588,48.71 U6.4@18.604,48.726
VREGSW: L5.1 U3.38 | length 6.4
  Top Layer w0.203: U3.38@42.052,31.883 42.066,31.897 42.066,32.422 43.578,33.934 45.896,33.934 46.015,34.053 46.015,34.211 46.164,34.36 L5.1@46.99,34.36
VSTOR: C21.1 C22.1 C23.1 R21.2 U6.6 U6.19 | length 65.7
  Top Layer w0.152: R21.2@16.391,46.838 16.391,41.643 ; C23.1@18.644,53.458 18.544,53.458 C23.1@18.529,53.472 ; C23.1@18.644,53.472 C23.1@18.529,53.472 ; U6.6@19.294,47.536 19.294,47.451 19.24,47.397 19.024,47.397 18.727,47.099 18.727,42.1 18.257,41.631 16.404,41.631 16.391,41.643 ; 16.391,41.643 11.529,41.643 10.922,42.25 10.922,56.917 12.96,58.954 12.96,65.98 13.452,66.472 15.513,66.472 16.445,65.539 16.445,54.966 17.256,54.156 17.846,54.156 C23.1@18.529,53.472
  Top Layer w0.254: C23.1@19.16,53.227 19.346,53.041 19.346,51.958 19.783,51.522 ; U6.19@19.793,50.927 19.793,51.522
  Top Layer w0.508: C23.1@18.656,53.47 20.409,53.47 C22.1@20.422,53.483
pads on no net: H3.2 H3.3 H3.4 MH6.1 MH7.1 MH8.1 SW1.S1 SW1.S2 U2.3 U3.13 U7.1 U8.3 U9.1 U9.7 U9.8 U9.10 U9.12 U9.13 U9.15 U9.16 U9.21 U9.22 U9.23 U9.24 U9.26 U9.27 U10.8 U10.9 U10.10 U10.14 U11.8 U11.9 U11.10 U11.14 U12.3 U13.3
copper on no net: | length 0
  Top Layer w0.203: 36.361,27.704 36.367,27.698

## Polygon pours and split planes (outlines as drawn)
GND on Layer 2 "GND_L2" (solid, remove dead copper, pour order 1): 0.382,9.754 57.226,9.754 57.226,69.621 0.356,69.621
GND on Layer 3 "GND_L2" (solid, remove dead copper, pour order 6): 0.433,9.728 57.277,9.728 57.277,69.621 0.406,69.621
VOUT on Top Layer "VOUT_L01_P017" (solid, pour order 17): 27.711,52.655 27.838,52.782 27.863,52.782 32.613,52.782 33.121,52.274 33.121,50.852 32.384,50.115 29.438,50.115 29.438,47.016 27.711,47.016
LBUCK on Top Layer "LBUCK_L01_P018" (solid, pour order 18): 21.196,51.361 21.198,51.36 22.148,51.36 23.577,52.789 25.498,52.789 25.498,50.489 21.312,50.489 21.294,50.471 21.196,50.471
LBOOST on Top Layer "LBOOST_L01_P019" (solid, pour order 19): 15.899,53.046 17.706,53.046 19.424,51.329 19.424,50.623 17.551,50.623 16.789,49.861 15.899,49.861
VREGSW on Top Layer "VREGSW_L01_P014" (solid, pour order 14): 41.909,32.503 42.723,33.317 42.723,34.036 43.586,34.9 48.209,34.9 48.209,33.426 43.409,33.426 42.486,32.503
+3V2_VMCU on Top Layer "+3V2_VMCU_L01_P013" (solid, pour order 13): 41.552,32.68 41.552,35.965 41.832,36.246 44.756,36.246 45.023,35.979 45.023,35.446 44.756,35.179 43.231,35.179 42.14,34.088 42.14,32.996 41.877,32.733 41.604,32.733
GND on Top Layer "GND_L01_P007" (solid, remove dead copper, pour order 11): 0,9.754 0.863,9.754 44.094,9.754 44.094,0.027 44.093,0.025 44.119,0 47.6,0 47.6,15.443 41.707,15.443 41.707,20.904 39.487,23.124 39.487,25.013 36.627,25.013 36.627,15.443 33.658,12.474 0.053,12.474 0,12.474
+1V8_DCDC on Top Layer "+1V8_DCDC_L01_P015" (solid, pour order 15): 45.914,37.157 51.424,37.157 50.133,35.866 50.133,35.408 45.914,35.408
+3V2_VMCU on Top Layer "+3V2_VMCU_L01_P012" (solid, pour order 12): 40.234,32.548 39.882,32.548 37.199,35.232 37.387,35.42 38.544,35.42 40.234,33.731

## Keep-outs
Keep-Out Layer:
  lines w0.508: 0,40.492 0,62.865 7.112,69.977 7.112,70.002 50.546,70.002 50.597,70.002 57.658,62.967 57.658,53.594 57.633,53.594 55.296,53.594 54.839,53.137 54.839,49.403 55.296,48.946 57.658,48.946 57.658,9.855 47.803,0 9.543,0 0,9.405 0,20.32 -0.813,20.32 -0.813,29.078 0,29.078 0,29.5 4.343,29.5 4.343,40.506 0.008,40.492

## Other copper
Top Layer:
  pour cut-out: 38.436,24.333 38.436,10.49 39.599,10.49 39.599,24.333

## Silkscreen, mask and mechanical layers (free items; w line width, h text height)
Top Overlay:
  text "-" at 6.553,67.805 h0.64
  text "+" at 8.712,67.788 h0.64
  text "RX2" at 25.451,65.862 h0.64
  text "TX2" at 27.94,65.837 h0.64
  text "-" at 3.556,62.065 h0.64
  text "+" at 3.505,59.33 h0.64
  text "R_SENSE" at 34.743,56.472 h0.64 r90
  text "VMCU" at 34.849,53.464 h0.64 r90
  text "VOUT" at 34.849,50.432 h0.64 r90
  text "GND" at 38.76,47.422 h0.64 r90
  text "CLK" at 51.689,47.295 h0.64 r90
  text "MOSI" at 46.38,47.244 h0.64 r90
  text "MISO" at 48.997,47.092 h0.64 r90
  text "P_CS" at 41.347,46.965 h0.64 r90
  text "W_CS" at 43.862,46.838 h0.64 r90
  text "+" at 50.902,44.243 h0.64
  text "-" at 50.952,41.923 h0.64
  text "SDA" at 15.57,22.403 h0.51 r90
  text "C" at 48.965,19.653 h1.5
  text "U" at 48.965,16.758 h1.5
  text "B" at 48.965,13.862 h1.5
  text "I" at 49.215,10.966 h1.5
  text "T" at 48.965,8.071 h1.5

## Text inside footprints (layer, text, board x,y; h text height)
H3: Mechanical 13 AsslyInfo "PCB END" at -1.524,26.354 h0.5 r270
LCD1: Mechanical 13 AsslyInfo "PCB END" at 2.568,37.134 h0.64 r270